# Altium PCB PCB.PcbDoc
Units mm, origin at the board's own origin, x right, y up, seen from the top; angles counter-clockwise.
Board outline 24 x 20.6 mm, 2 copper layers (Top Layer, Bottom Layer), stack 1.581 mm thick; 2 components, 5 nets, 24 pads, 4 vias.
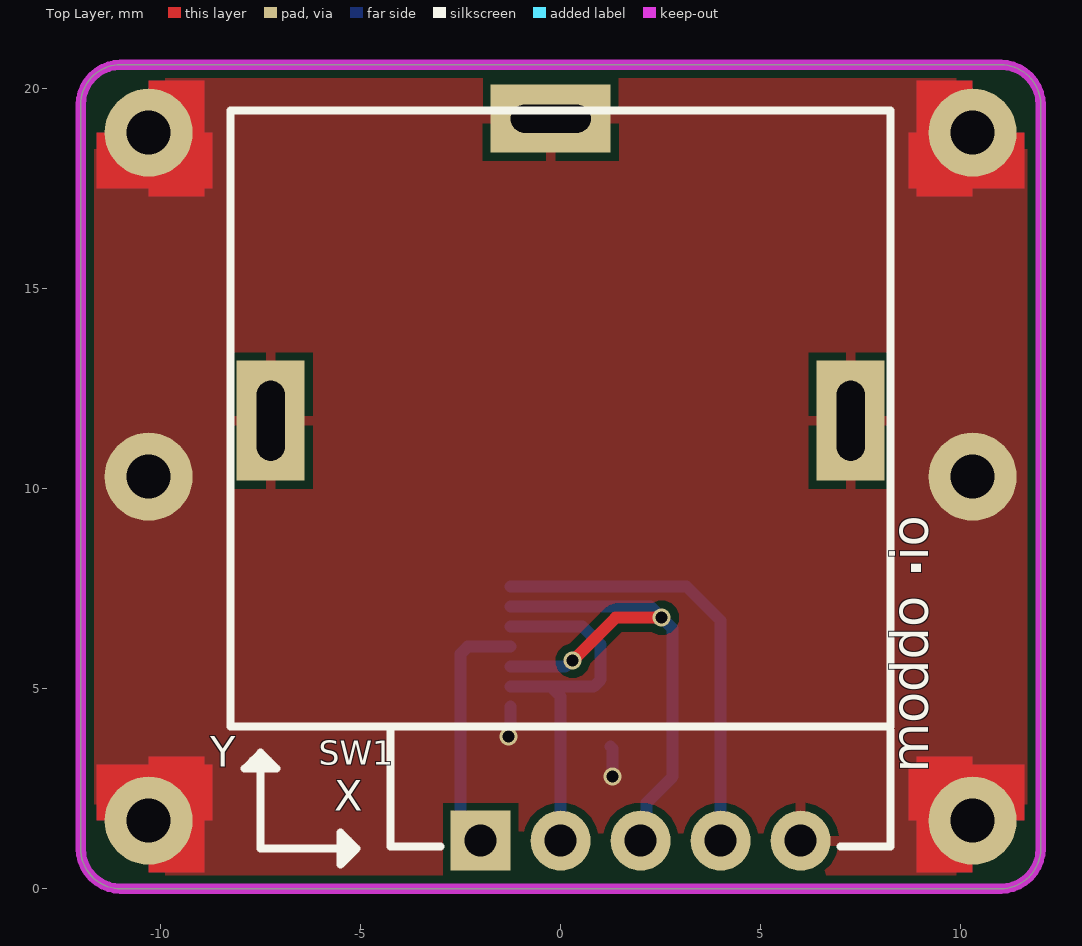
[diagram p0: Top Layer view]
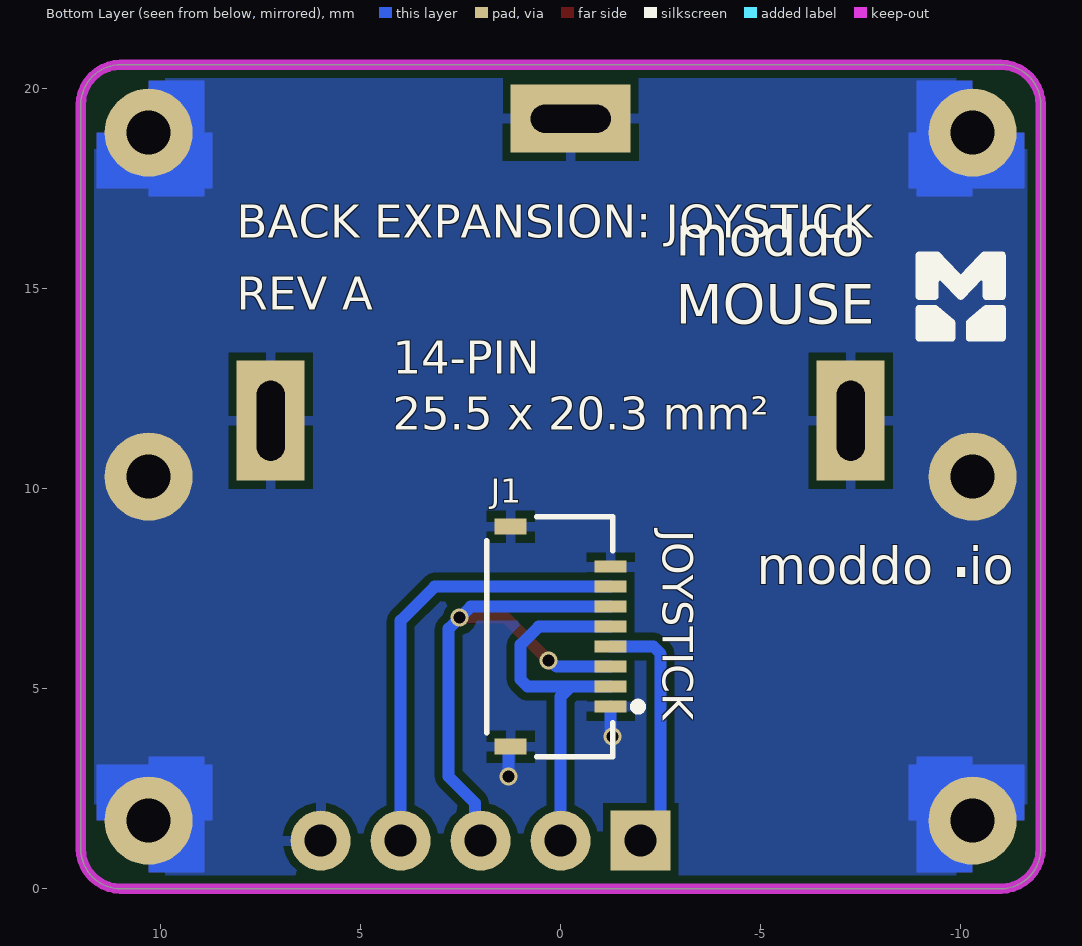
[diagram p1: Bottom Layer view, seen from below]

## Layer stack, top to bottom
Top Solder: solder mask 0.0102, Solder Resist, Dk 3.5
Top Layer: signal copper 0.0356
Dielectric 1: dielectric 1.51, FR-4, Dk 4.8
Bottom Layer: signal copper 0.0356
Bottom Solder: solder mask 0.0102, Solder Resist, Dk 3.5

## Board outline
-12,1 ccw(c-11,1) -11,0 11,0 ccw(c11,1) 12,1 12,19.6 ccw(c11,19.6) 11,20.6 -11,20.6 ccw(c-11,19.6) -12,19.6

## Design rules (kind name [scope] priority, off if disabled: settings)
BoardOutlineClearance [All] p1: gap=0.2 ignorepadtopadclearanceinfootprint=FALSE
Clearance GND_bot [InNamedPolygon('GND_bot')] p1: gap=0.2 ignorepadtopadclearanceinfootprint=FALSE
Clearance GND_top [InNamedPolygon('GND_top')] p2: gap=0.1 ignorepadtopadclearanceinfootprint=FALSE
Clearance [All] p3: gap=0.2 ignorepadtopadclearanceinfootprint=FALSE
HoleSize [All] p1: absolutevalues=TRUE maxlimit=20 minlimit=0.025 maxpercent=80.000 minpercent=20.000
MinimumSolderMaskSliver [All] p1: minsoldermaskwidth=0.05
PolygonConnect [All] p1: thpad.connectstyle=Relief thpad.reliefconductorwidth=0.254 thpad.reliefentries=4 thpad.polygonreliefangle="90 Angle" thpad.airgapwidth=0.2 smdpad.connectstyle=Relief smdpad.reliefconductorwidth=0.254 smdpad.reliefentries=4 smdpad.polygonreliefangle="90 Angle" smdpad.airgapwidth=0.2 via.connectstyle=Direct via.reliefconductorwidth=0.254 via.reliefentries=4 via.polygonreliefangle="90 Angle" via.airgapwidth=0.254
RoutingVias [All] p1: holewidth=0.3 width=0.4 viastyle="Through Hole" minholewidth=0.3 minwidth=0.4 maxholewidth=2 maxwidth=10
SilkToSilkClearance [All] p1: silktosilkclearance=0.01
SilkToSolderMaskClearance [IsPad] p1: minsilkscreentomaskgap=0.001 clearancetoexposedcopper=TRUE
SolderMaskExpansion [All] p1: expansion=0.05 istentingtop=FALSE
SupplyNets "Schematic Supply Nets" [InNet('VDD')] p1: voltage=0.000
SupplyNets "Schematic Supply Nets_1" [InNet('GND')] p2: voltage=0.000
UnRoutedNet [All] p1: checkbadconnections=TRUE
Width [All] p1: maxlimit=2.54 minlimit=0.089 preferedwidth=0.254
25 further rules are at their usual default settings.

## Components (designator, comment, footprint, x,y, rotation, side; value= is the part's Value field where it differs from the comment)
J1 "2328702-8" 2328702-8 2.1,6.3 r270 bottom
SW1 "YHE-YG16-001 SH1B166A1" Joystick_8p_16_5mm_15_5mm -0.25,11.7 r0 top

## Footprints (in the part's own frame and the unit in brackets; to place one, negate y for a bottom-side part, rotate by r counter-clockwise, add the part's x,y. Pads: shape width x height; smd on the part's side, far side on the other; paste and mask are expansions set on the pad)
2328702-8 [mm]
  rect 0.3x0.8 smd mask+0.05: 1(1.75,3.35) 2(1.25,3.35) 3(0.75,3.35) 4(0.25,3.35) 5(-0.25,3.35) 6(-0.75,3.35) 7(-1.25,3.35) 8(-1.75,3.35)
  rect 0.4x0.8 smd mask+0.05: S1(2.75,0.85) S2(-2.75,0.85)
  silkscreen extent -3,0.25 3,4.13, body extent -3,0.25 3,4.08, height 1.06
Joystick_8p_16_5mm_15_5mm [mm]
  rect 1.5x1.5 hole 0.8: 1(-1.75,-10.5)
  round 1.5 hole 0.8: 2(0.25,-10.5) 3(2.25,-10.5) 4(4.25,-10.5) 5(6.25,-10.5)
  rect 1.7x3 hole 0.7 slot 2 at 90 deg: 6(-7,0) 6(7.5,0)
  rect 3x1.7 hole 0.7 slot 2 at 0 deg: 6(0,7.55)
  silkscreen extent -8,-10.65 8.5,7.75

## Part data
J1: "FFC/FPC Connector, 8 Contact(s), 1 Row(s), Right Angle, Solder Terminal, Natural Insulator", Actuator Color=Black, Flammability Rating="UL94 V-0", Housing Color=Natural, Manufacturer="TE Connectivity", Max Operating Temperature=85°C, Min Operating Temperature=-40°C, Operating Supply Voltage=50V, Actuator Material=Thermoplastic, Category="FFC / FPC", ComponentLink1Description=https://www.te.com/commerce/DocumentDelivery/DDEController?Action=srchrtrv&amp;DocNm=2328702&amp;DocType=Customer+Drawing&amp;DocLang=English&src-supplier=Digikey, ComponentLink1URL=https://www.te.com/commerce/DocumentDelivery/DDEController?Action=srchrtrv&amp;DocNm=2328702&amp;DocType=Customer+Drawing&amp;DocLang=English&src-supplier=Digikey, Connector System=Wire-to-Board, Contact Material="Copper Alloy", Contact Plating=Gold, Gender=Receptacle, Height=1mm, Housing Material=Thermoplastic, Length=6mm, Manufacturer Part Number=2328702-8, Mounting Technology="Surface Mount", Number of Contacts=8, Number of Positions=8, Number of Rows=1, Orientation="Right Angle", Packaging="Cut Tape", Plating=Gold, Pricing 1="28000=0.0961 (USD)", RoHS=Yes, Sealable="No (Without)", Series=-, Stock 1=56000, Supplier 1="Arrow Electronics", Supplier Part Number 1=2328702-8, Termination=Solder, Voltage Rating=50V
SW1: "Through Hole Navigation Switches, Joystick RoHS", Manufacturer=YTL, Manufacturer Part Number="YHE-YG16-001 SH1B166A1"

## Free pads (board coordinates)
  round 2.2 hole 1.1: ""(-10.3,1.7) ""(-10.3,10.3) ""(-10.3,18.9) ""(10.3,1.7) ""(10.3,10.3) ""(10.3,18.9)

## Via types
v1: diameter 0.45, hole 0.3, Top Layer to Bottom Layer, tented both sides, 4 vias

## Nets (pads, with @x,y where several pads share a name; then routed paths per layer and width w, separated by ;. In a path a pad name is that pad's centre, name@x,y a point inside that pad or via, vN(x,y) a via of type N, cw(c..) or ccw(c..) an arc to the next point about the centre after c; other vN are vias at no path point)
GND: J1.1 J1.8 J1.S1 J1.S2 pad. SW1.5 SW1.6 | length 1.5
  Bottom Layer w0.3: v1(-1.3,3.8) -1.3,3.854 -1.25,3.904 J1.1 ; J1.S1 1.3,3.5 v1(1.3,2.8)
PRESS_CLICK: J1.7 SW1.4 | length 11.1
  Bottom Layer w0.3: J1.7 3.15,7.55 4,6.7 SW1.4
VDD: J1.4 SW1.1 | length 6.2
  Bottom Layer w0.3: SW1.1 -2.5,1.7 -2.5,5.874 -2.324,6.05 J1.4
X_ADC: J1.2 J1.5 SW1.2 | length 9.6
  Bottom Layer w0.3: J1.2 -0.25,5.05 ; J1.5 0.55,6.55 1,6.1 1,5.226 0.824,5.05 -0.25,5.05 ; SW1.2 0,4.8 -0.25,5.05
Y_ADC: J1.3 J1.6 SW1.3 | length 14.2
  Top Layer w0.3: v1(0.3,5.7) 1.375,6.775 v1(2.525,6.775)
  Bottom Layer w0.3: J1.3 0.109,5.55 0.259,5.7 v1(0.3,5.7) ; J1.6 2.25,7.05 2.8,6.5 2.8,2.8 2.149,2.149 2.149,1.349 SW1.3

## Polygon pours and split planes (outlines as drawn)
GND on Top Layer "GND_L01_P000" (solid, pour order 0): -12,1 ccw(c-11,1) -11,0 11,0 ccw(c11,1) 12,1 12,19.6 ccw(c11,19.6) 11,20.6 -11,20.6 ccw(c-11,19.6) -12,19.6
GND on Bottom Layer "GND_L02_P001" (solid, pour order 1): -12,1 ccw(c-11,1) -11,0 11,0 ccw(c11,1) 12,1 12,19.6 ccw(c11,19.6) 11,20.6 -11,20.6 ccw(c-11,19.6) -12,19.6

## Keep-outs
Keep-Out Layer:
  the board outline again, w0.254

## Other copper
Top Layer:
  region net GND: 11.6,18.9 8.7,18.9 8.7,17.5 11.6,17.5
  region net GND: 8.9,20.2 8.9,17.3 10.3,17.3 10.3,20.2
  region net GND: -10.3,20.2 -10.3,17.3 -8.9,17.3 -8.9,20.2
  rectangle net GND: -11.6,17.5 -8.7,18.9
  rectangle net GND: -11.6,1.7 -8.7,3.1
  region net GND: -8.9,0.4 -8.9,3.3 -10.3,3.3 -10.3,0.4
  region net GND: 11.6,3.1 8.7,3.1 8.7,1.7 11.6,1.7
  region net GND: 10.3,0.4 10.3,3.3 8.9,3.3 8.9,0.4
Bottom Layer:
  region net GND: -10.3,20.2 -10.3,17.3 -8.9,17.3 -8.9,20.2
  rectangle net GND: -11.6,17.5 -8.7,18.9
  region net GND: 11.6,18.9 8.7,18.9 8.7,17.5 11.6,17.5
  region net GND: 8.9,20.2 8.9,17.3 10.3,17.3 10.3,20.2
  region net GND: 10.3,0.4 10.3,3.3 8.9,3.3 8.9,0.4
  region net GND: 11.6,3.1 8.7,3.1 8.7,1.7 11.6,1.7
  region net GND: -8.9,0.4 -8.9,3.3 -10.3,3.3 -10.3,0.4
  rectangle net GND: -11.6,1.7 -8.7,3.1

## Silkscreen, mask and mechanical layers (free items; w line width, h text height)
Top Overlay:
  lines w0.2: -7.7,3.1 -7.3,3.1 ; -7.7,3.2 -7.3,3.2 ; -5.4,0.8 -5.4,1.2 ; -5.3,0.8 -5.3,1.2 ; -7.5,3.4 -7.5,1 -5.1,1 ; -7.5,3.4 -7.1,3 -7.9,3 -7.5,3.4 ; -5.1,1 -5.5,1.4 -5.5,0.6 -5.1,1
  text "io" at 9.5,8.2 h1.6 r90
  text "." at 9.5,7.7 h2.5 r90
  text "moddo" at 9.5,2.9 h1.6 r90
  text "Y" at -8.758,2.8 h1.3
  text "X" at -5.658,1.7 h1.3
Bottom Overlay:
  drawing of 3 lines, arcs and shapes, not listed
  text "BACK EXPANSION: JOYSTICK" at 8.1,16 h1.4
  text "REV A" at 8.1,14.2 h1.4
  text "moddo / MOUSE" at -2.882,13.796 h1.7
  text "14-PIN / 25.5 x 20.3 mm²" at 4.2,11.2 h1.4
  text "JOYSTICK" at -2.3,8.956 h1.3 r90
  text "io" at -10.2,7.3 h1.6
  text "." at -9.7,7.3 h2.5
  text "moddo" at -4.9,7.3 h1.6